# Altium PCB PWR_PCB2.PcbDoc (part 1 of 3)
Units mil, origin at the board's own origin, x right, y up, seen from the top; angles counter-clockwise.
Board outline 9000 x 6000 mil, 4 copper layers (Top Layer, GND Layer, Power Layer, Bottom Layer), stack 27.912 mil thick; 125 components, 92 nets, 479 pads, 4387 vias.
Unrouted connection lines stored in the file: 22.
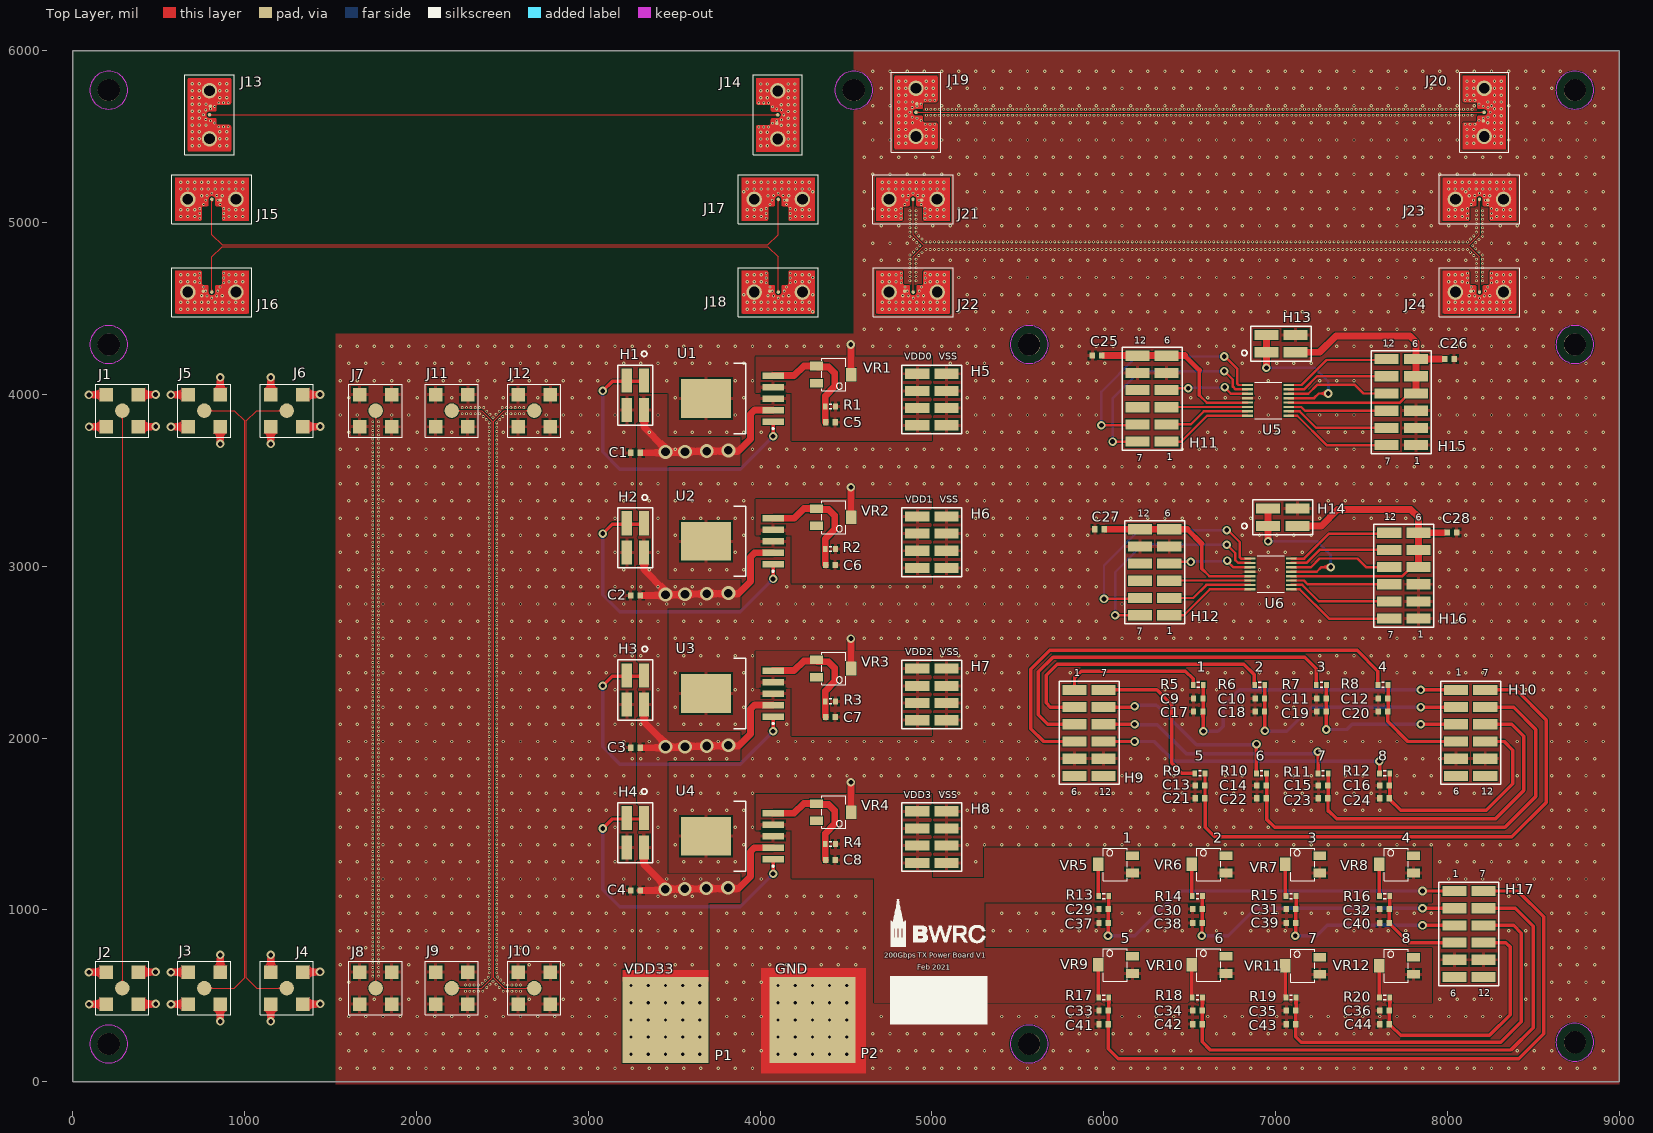
[diagram p0: Top Layer view]
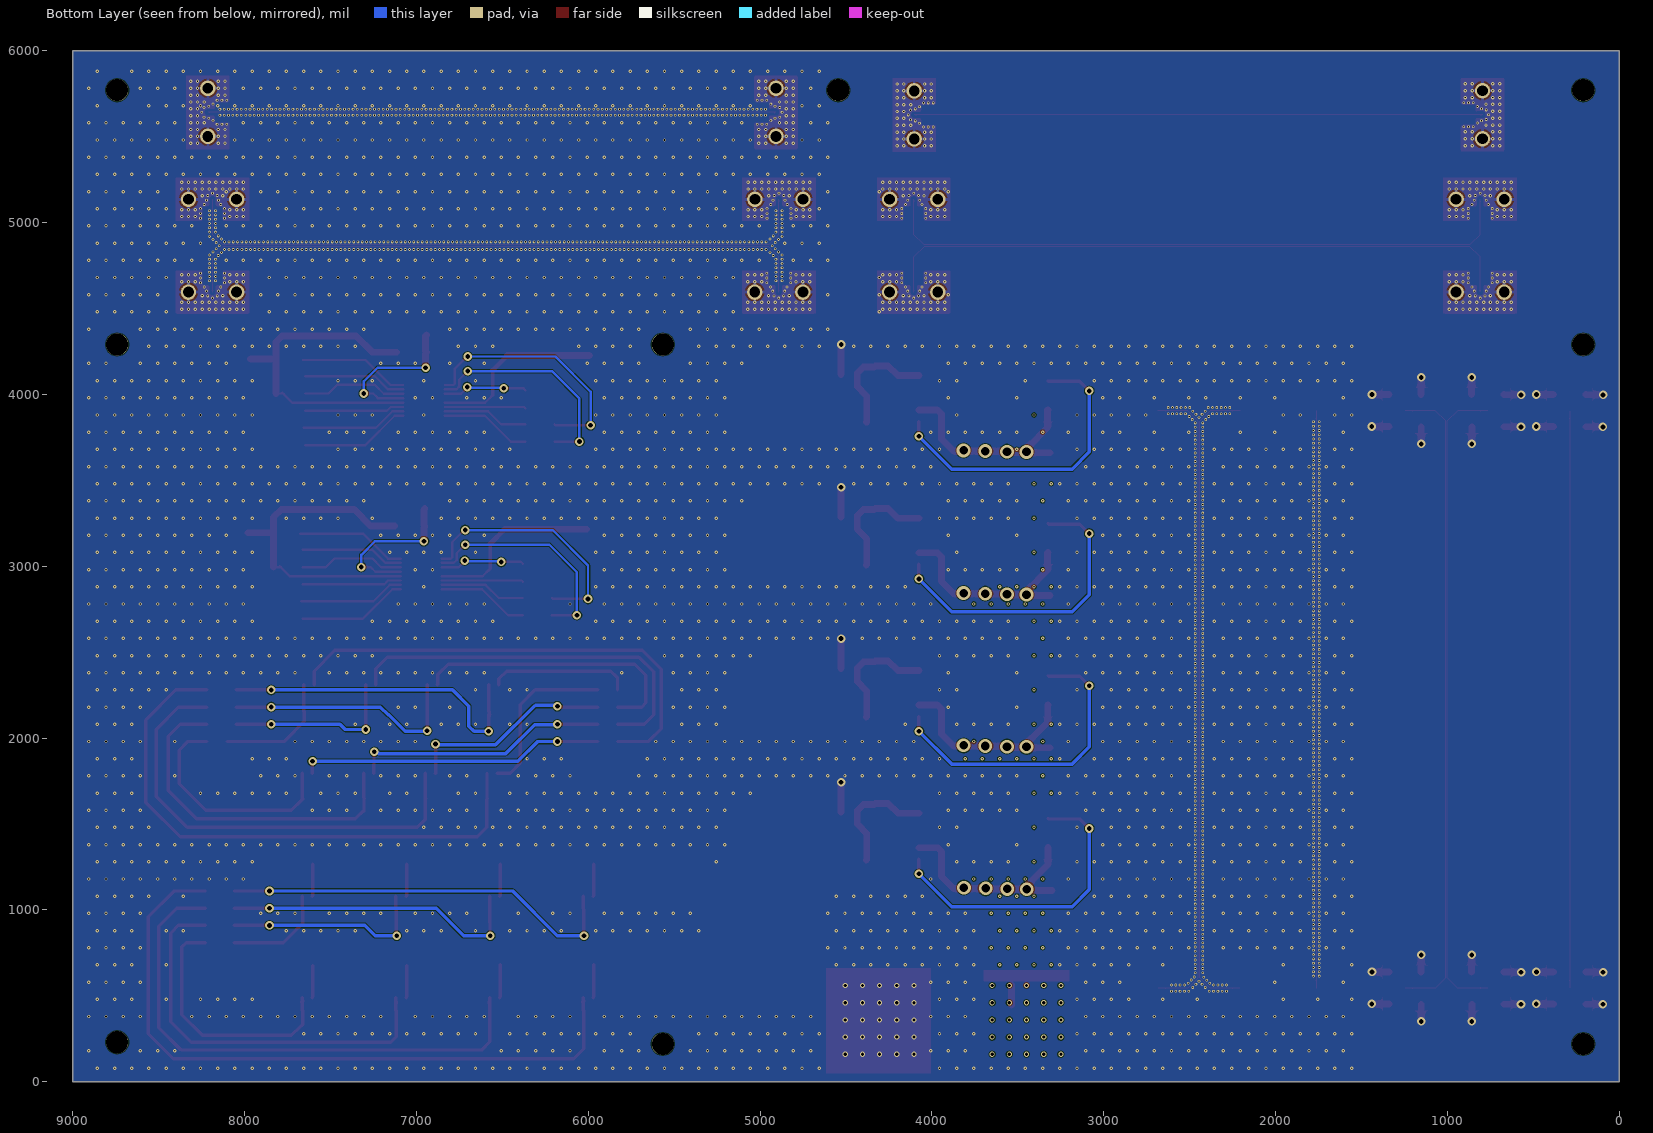
[diagram p1: Bottom Layer view, seen from below]
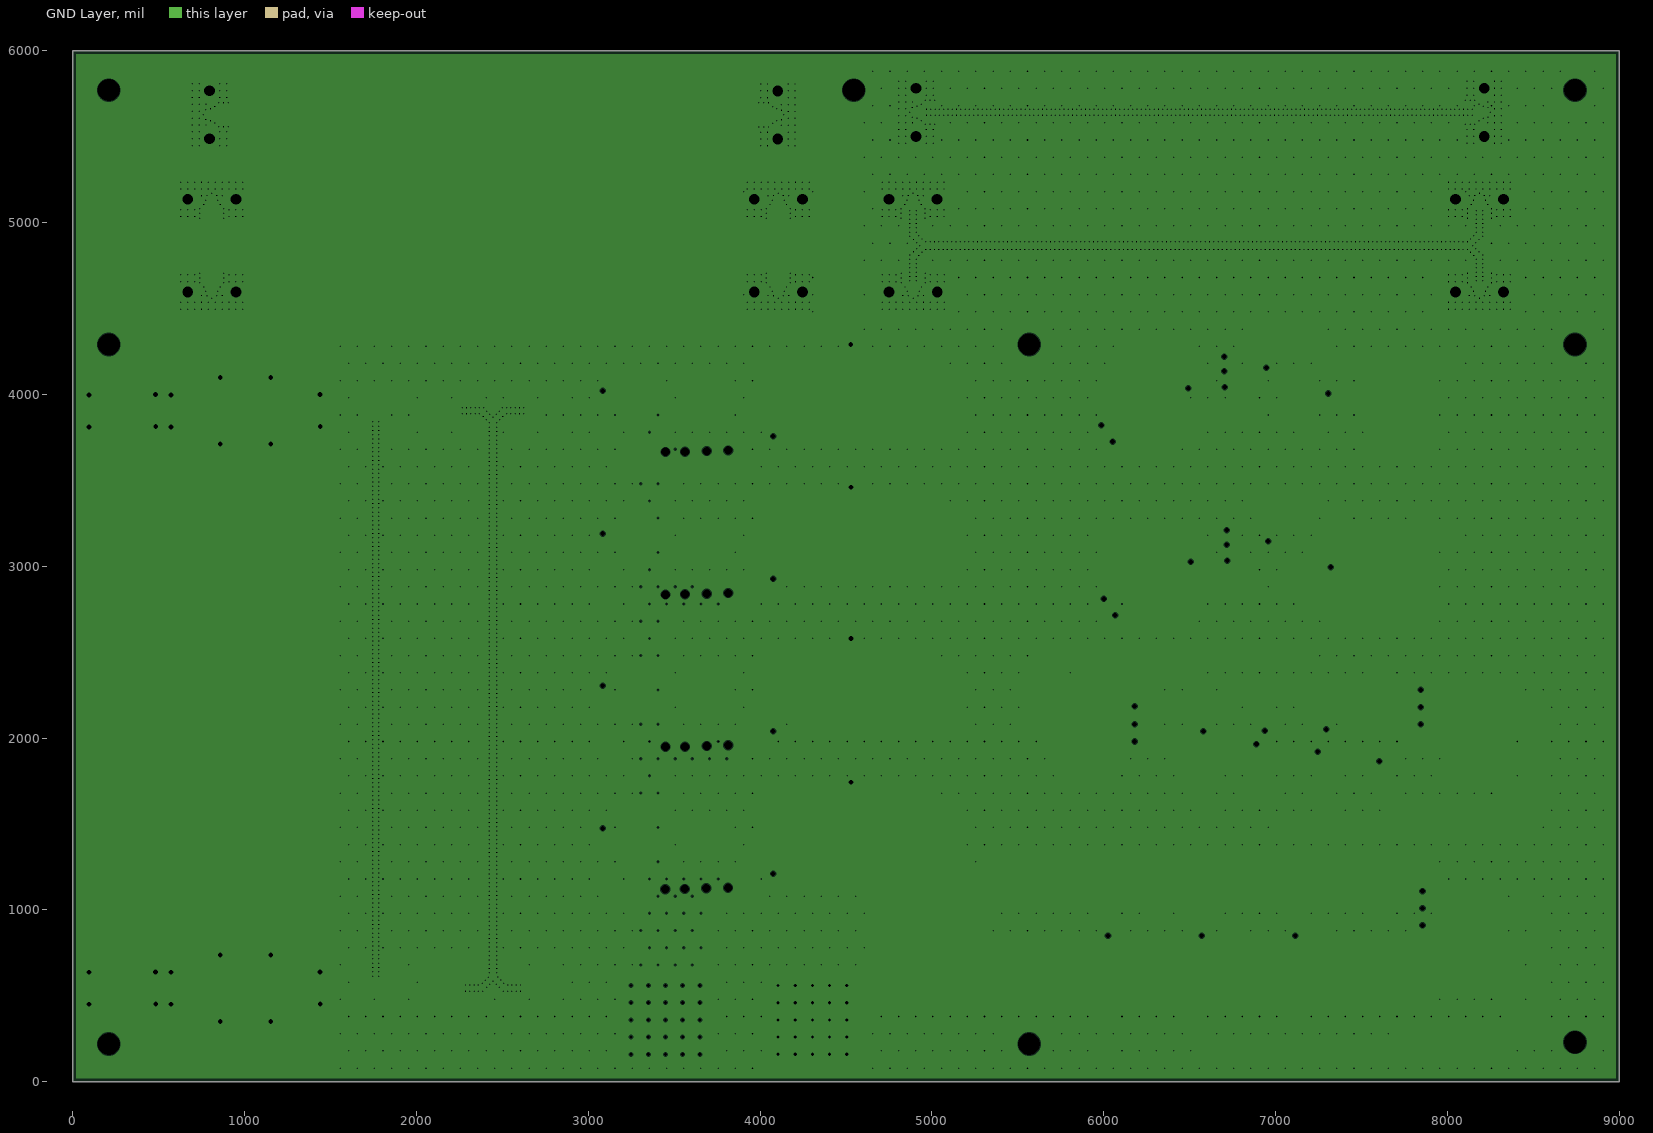
[diagram p2: GND Layer, clearances drawn from the general rule]
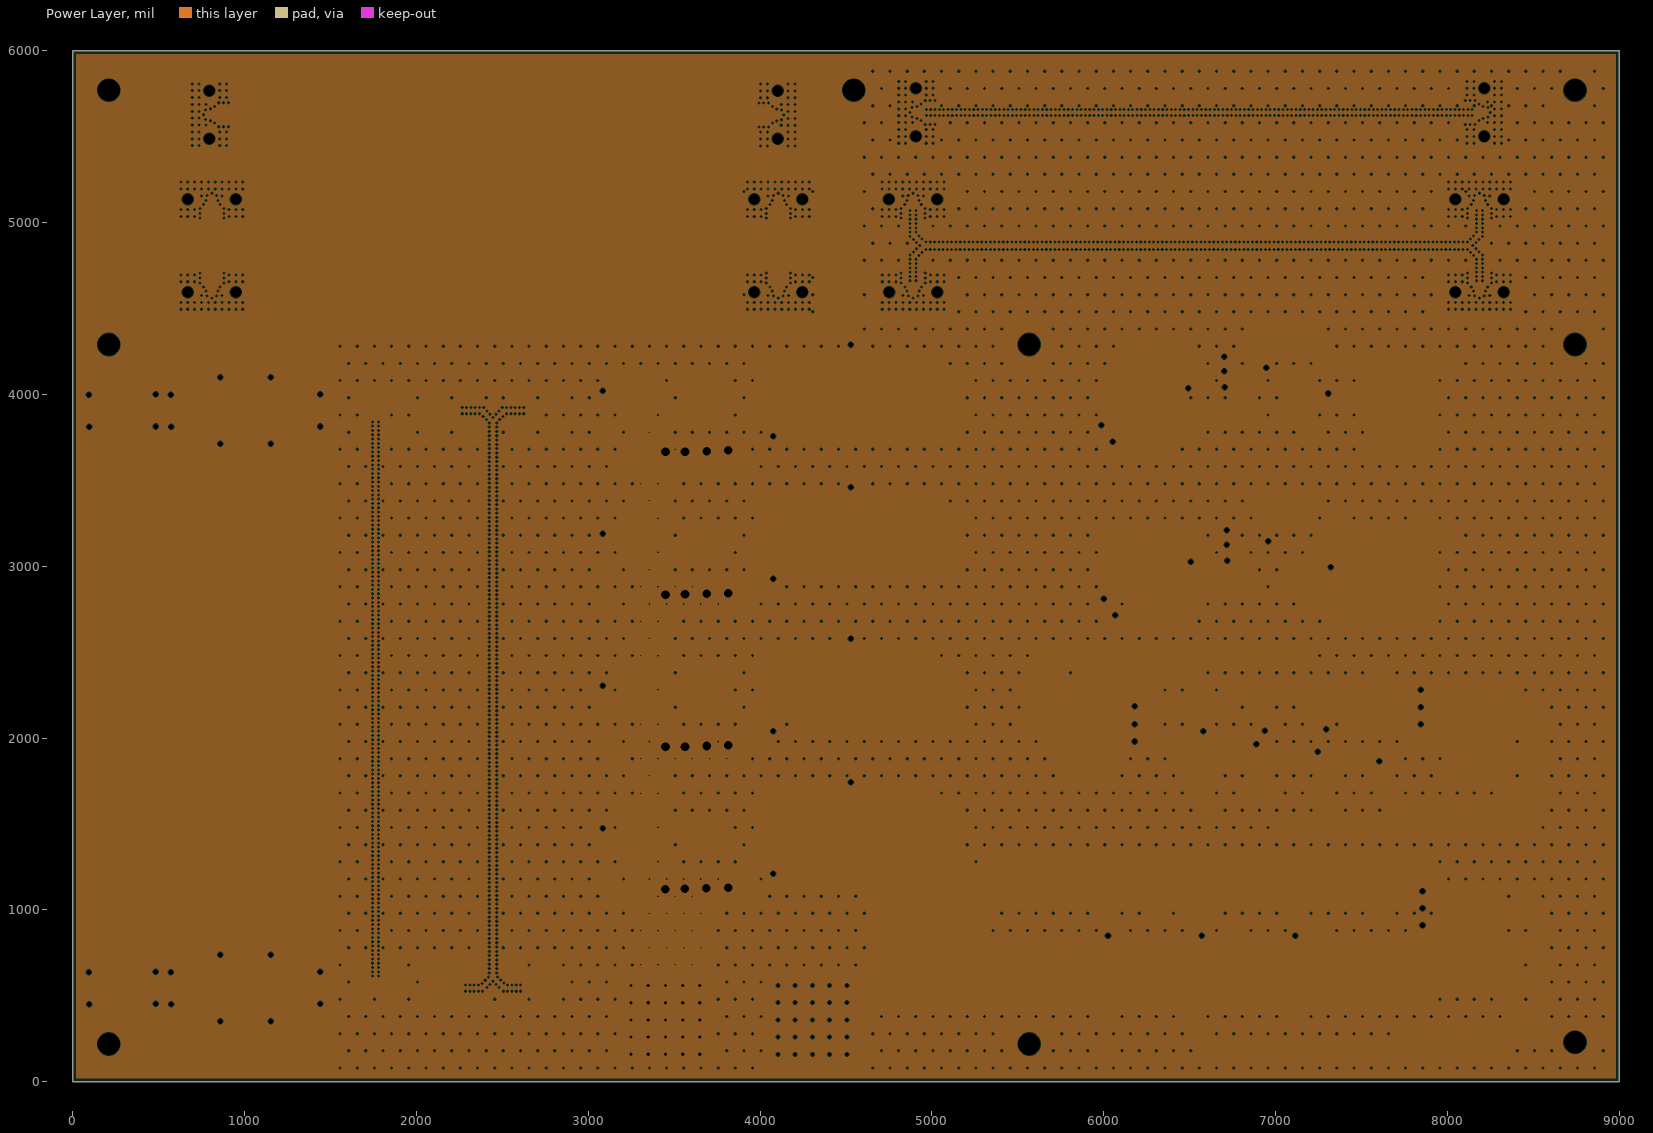
[diagram p3: Power Layer, clearances drawn from the general rule]

## Layer stack, top to bottom
Top Solder: solder mask 0.4, Solder Resist, Dk 3.5
Top Layer: signal copper 1.4
Dielectric 2: prepreg 3.5, PP-001, Dk 4.02
GND Layer: plane copper 2.7559, net GND
Dielectric 1: dielectric 12.6, FR-4, Dk 4.8
Power Layer: plane copper 2.7559, net VDD33
Dielectric 3: prepreg 3.5, PP-001, Dk 4.02
Bottom Layer: signal copper 1.4
Bottom Solder: solder mask 0.4, Solder Resist, Dk 3.5

## Board outline
0,0 0,6000 9000,6000 9000,0

## Design rules (kind name [scope] priority, off if disabled: settings)
Clearance [All] p1: gap=5 ignorepadtopadclearanceinfootprint=FALSE except(10: SMDPad-Via THPad-Via; 20: Arc-THPad Track-THPad SMDPad-THPad THPad-THPad Via-Via)
DiffPairsRouting [All] p1: maxlimit=10 minlimit=5 mostfreqgap=10 toplayer_maxgap=5 toplayer_prefgap=5 toplayer_minwidth=4.5 toplayer_maxwidth=5 toplayer_prefwidth=4.5 bottomlayer_mingap=10 bottomlayer_minwidth=15 bottomlayer_maxwidth=15 bottomlayer_prefwidth=15 maxuncoupledlength=500
HoleSize [All] p1: absolutevalues=TRUE maxlimit=200 minlimit=8 maxpercent=80.000 minpercent=20.000
MinimumSolderMaskSliver [All] p1: minsoldermaskwidth=8
PlaneClearance [All] p1: clearance=5
PlaneConnect [All] p1: planeconnectstyle=Direct reliefexpansion=20 reliefentries=4 reliefconductorwidth=10 reliefairgap=10
PolygonConnect [All] p1: thpad.connectstyle=Relief thpad.reliefconductorwidth=20 thpad.reliefentries=4 thpad.polygonreliefangle="90 Angle" thpad.airgapwidth=10 smdpad.connectstyle=Relief smdpad.reliefconductorwidth=20 smdpad.reliefentries=4 smdpad.polygonreliefangle="90 Angle" smdpad.airgapwidth=10 via.connectstyle=Direct via.reliefconductorwidth=10 via.reliefentries=4 via.polygonreliefangle="90 Angle" via.airgapwidth=10
RoutingVias [All] p1: holewidth=28 width=50 viastyle="Through Hole" minholewidth=8 minwidth=16 maxholewidth=150 maxwidth=200
SilkToSolderMaskClearance [IsPad] p1: minsilkscreentomaskgap=2 clearancetoexposedcopper=TRUE
SolderMaskExpansion [All] p1: expansion=4 istentingtop=FALSE
Width [All] p1: maxlimit=40 minlimit=4.5 preferedwidth=20
24 further rules are at their usual default settings.

## Classes and differential pairs
differential pair CK3: +CK3_P -CK3_N
differential pair CK2: +CK2_P -CK2_N
differential pair CK1: +CK1_P -CK1_N
differential pair CK0: +CK0_P -CK0_N

## Components (designator, comment, footprint, x,y, rotation, side; value= is the part's Value field where it differs from the comment)
C1 "Cap Semi" 1608[0603] 3274.5,3660 r0 top value=10uF
C2 "Cap Semi" 1608[0603] 3274.5,2830 r0 top value=10uF
C3 "Cap Semi" 1608[0603] 3274.47,1943.92 r0 top value=10uF
C4 "Cap Semi" 1608[0603] 3274.47,1113.92 r0 top value=10uF
C5 "Cap Semi" 1608[0603] 4409.5,3837.5 r0 top value=3.3nF
C6 "Cap Semi" 1608[0603] 4409.5,3007.5 r0 top value=3.3nF
C7 "Cap Semi" 1608[0603] 4409.47,2121.42 r0 top value=3.3nF
C8 "Cap Semi" 1608[0603] 4409.47,1291.42 r0 top value=3.3nF
C9 "Cap Semi" 1608[0603] 6549.5,2230 r0 top value=10uF
C10 "Cap Semi" 1608[0603] 6907.83,2230 r0 top value=10uF
C11 "Cap Semi" 1608[0603] 7266.17,2230 r0 top value=10uF
C12 "Cap Semi" 1608[0603] 7624.5,2230 r0 top value=10uF
C13 "Cap Semi" 1608[0603] 6559.5,1725 r0 top value=10uF
C14 "Cap Semi" 1608[0603] 6917.83,1725 r0 top value=10uF
C15 "Cap Semi" 1608[0603] 7276.17,1725 r0 top value=10uF
C16 "Cap Semi" 1608[0603] 7634.5,1725 r0 top value=10uF
C17 "Cap Semi" 1608[0603] 6549.5,2155 r0 top value=1uF
C18 "Cap Semi" 1608[0603] 6907.83,2155 r0 top value=1uF
C19 "Cap Semi" 1608[0603] 7266.17,2155 r0 top value=1uF
C20 "Cap Semi" 1608[0603] 7624.5,2155 r0 top value=1uF
C21 "Cap Semi" 1608[0603] 6559.5,1650 r0 top value=1uF
C22 "Cap Semi" 1608[0603] 6917.83,1650 r0 top value=1uF
C23 "Cap Semi" 1608[0603] 7276.17,1650 r0 top value=1uF
C24 "Cap Semi" 1608[0603] 7634.5,1650 r0 top value=1uF
C25 "Cap Semi" 1608[0603] 5961,4225 r0 top value=1uF
C26 "Cap Semi" 1608[0603] 8011,4205 r180 top value=100nF
C27 "Cap Semi" 1608[0603] 5976,3215 r0 top value=1uF
C28 "Cap Semi" 1608[0603] 8026,3195 r180 top value=100nF
C29 "Cap Semi" 1608[0603] 5999.5,1005 r0 top value=10uF
C30 "Cap Semi" 1608[0603] 6544.5,1005 r0 top value=10uF
C31 "Cap Semi" 1608[0603] 7089.5,1005 r0 top value=10uF
C32 "Cap Semi" 1608[0603] 7634.5,1005 r0 top value=10uF
C33 "Cap Semi" 1608[0603] 5999.5,415 r0 top value=10uF
C34 "Cap Semi" 1608[0603] 6544.5,415 r0 top value=10uF
C35 "Cap Semi" 1608[0603] 7089.5,415 r0 top value=10uF
C36 "Cap Semi" 1608[0603] 7634.5,415 r0 top value=10uF
C37 "Cap Semi" 1608[0603] 5999.5,925 r0 top value=1uF
C38 "Cap Semi" 1608[0603] 6544.5,925 r0 top value=1uF
C39 "Cap Semi" 1608[0603] 7089.5,925 r0 top value=1uF
C40 "Cap Semi" 1608[0603] 7634.5,925 r0 top value=1uF
C41 "Cap Semi" 1608[0603] 5999.5,335 r0 top value=1uF
C42 "Cap Semi" 1608[0603] 6544.5,335 r0 top value=1uF
C43 "Cap Semi" 1608[0603] 7089.5,335 r0 top value=1uF
C44 "Cap Semi" 1608[0603] 7634.5,335 r0 top value=1uF
H1 "HEADER_2X2_SMT" HEADER_2X2_SMT 3274.5,3995 r90 top
H2 "HEADER_2X2_SMT" HEADER_2X2_SMT 3274.5,3165 r90 top
H3 "HEADER_2X2_SMT" HEADER_2X2_SMT 3274.47,2279.92 r90 top
H4 "HEADER_2X2_SMT" HEADER_2X2_SMT 3274.47,1448.92 r90 top
H5 "HEADER_2X4_SMT" HEADER_2X4_SMT 4999.5,3970 r180 top
H6 "HEADER_2X4_SMT" HEADER_2X4_SMT 4999.5,3140 r180 top
H7 "HEADER_2X4_SMT" HEADER_2X4_SMT 4999.47,2253.92 r180 top
H8 "HEADER_2X4_SMT" HEADER_2X4_SMT 4999.47,1423.92 r180 top
H9 "HEADER_2X6_SMT" HDR2X6_SMT 5914.5,2030 r0 top
H10 "HEADER_2X6_SMT" HDR2X6_SMT 8134.5,2030 r0 top
H11 "HEADER_2X6_SMT" HDR2X6_SMT 6281,3975 r180 top
H12 "HEADER_2X6_SMT" HDR2X6_SMT 6296,2965 r180 top
H13 "HEADER_2X2_SMT" HEADER_2X2_SMT 7031,4295 r180 top
H14 "HEADER_2X2_SMT" HEADER_2X2_SMT 7041,3285 r180 top
H15 "HEADER_2X6_SMT" HDR2X6_SMT 7731,3955 r180 top
H16 "HEADER_2X6_SMT" HDR2X6_SMT 7746,2945 r180 top
H17 "HEADER_2X6_SMT" HDR2X6_SMT 8124.5,860 r0 top
J1 "Con RF SMA" CON-001-250X250/SMA-SMT 289,3905 r0 top
J2 "Con RF SMA" CON-001-250X250/SMA-SMT 289,545 r0 top
J3 "Con RF SMA" CON-001-250X250/SMA-SMT 766,545 r90 top
J4 "Con RF SMA" CON-001-250X250/SMA-SMT 1246,545 r90 top
J5 "Con RF SMA" CON-001-250X250/SMA-SMT 766,3905 r90 top
J6 "Con RF SMA" CON-001-250X250/SMA-SMT 1246,3905 r90 top
J7 "Con RF SMA" CON-001-250X250/SMA-SMT 1763,3905 r0 top
J8 "Con RF SMA" CON-001-250X250/SMA-SMT 1763,545 r0 top
J9 "Con RF SMA" CON-001-250X250/SMA-SMT 2206,545 r90 top
J10 "Con RF SMA" CON-001-250X250/SMA-SMT 2686,545 r90 top
J11 "Con RF SMA" CON-001-250X250/SMA-SMT 2206,3905 r90 top
J12 "Con RF SMA" CON-001-250X250/SMA-SMT 2686,3905 r90 top
J13 "CON_K_SMT_2d92" CON_K_SMT_2D92 796,5627 r0 top
J14 "CON_K_SMT_2d92" CON_K_SMT_2D92 4103,5626 r180 top
J15 "CON_K_SMT_2d92" CON_K_SMT_2D92 810,5135 r270 top
J16 "CON_K_SMT_2d92" CON_K_SMT_2D92 810,4595 r90 top
J17 "CON_K_SMT_2d92" CON_K_SMT_2D92 4106,5135 r270 top
J18 "CON_K_SMT_2d92" CON_K_SMT_2D92 4106,4595 r90 top
J19 "CON_K_SMT_2d92" CON_K_SMT_2D92 4907,5641 r0 top
J20 "CON_K_SMT_2d92" CON_K_SMT_2D92 8213.5,5641 r180 top
J21 "CON_K_SMT_2d92" CON_K_SMT_2D92 4890,5135 r270 top
J22 "CON_K_SMT_2d92" CON_K_SMT_2D92 4891,4595 r90 top
J23 "CON_K_SMT_2d92" CON_K_SMT_2D92 8186,5135 r270 top
J24 "CON_K_SMT_2d92" CON_K_SMT_2D92 8186,4595 r90 top
P1 "BANANA_JACK_SMT" BANANA_JACK_SMT 3449.5,360 r0 top
P2 "BANANA_JACK_SMT" BANANA_JACK_SMT 4304.5,360 r0 top
R1 "Res3" J1-0603 4409.5,3930 r0 top value=1.4K
R2 "Res3" J1-0603 4409.5,3100 r0 top value=1.4K
R3 "Res3" J1-0603 4409.47,2213.92 r0 top value=1.4K
R4 "Res3" J1-0603 4409.47,1383.92 r0 top value=1.4K
R5 "Res3" J1-0603 6549.5,2310 r180 top value=1K
R6 "Res3" J1-0603 6907.83,2310 r180 top value=1K
R7 "Res3" J1-0603 7266.17,2310 r180 top value=1K
R8 "Res3" J1-0603 7624.5,2310 r180 top value=1K
R9 "Res3" J1-0603 6559.5,1795 r180 top value=1K
R10 "Res3" J1-0603 6917.83,1795 r180 top value=1K
R11 "Res3" J1-0603 7276.17,1795 r180 top value=1K
R12 "Res3" J1-0603 7634.5,1795 r180 top value=1K
R13 "Res3" J1-0603 5999.5,1080 r180 top value=1K
R14 "Res3" J1-0603 6544.5,1080 r180 top value=1K
R15 "Res3" J1-0603 7089.5,1080 r180 top value=1K
R16 "Res3" J1-0603 7634.5,1080 r180 top value=1K
R17 "Res3" J1-0603 5999.5,490 r180 top value=1K
R18 "Res3" J1-0603 6544.5,490 r180 top value=1K
R19 "Res3" J1-0603 7089.5,490 r180 top value=1K
R20 "Res3" J1-0603 7634.5,490 r180 top value=1K
U1 "LP38511TJ-ADJ" TJ5A_N 3839.5,3975 r180 top
U2 "LP38511TJ-ADJ" TJ5A_N 3839.5,3145 r180 top
U3 "LP38511TJ-ADJ" TJ5A_N 3839.47,2258.92 r180 top
U4 "LP38511TJ-ADJ" TJ5A_N 3839.47,1428.92 r180 top
U5 "MAX13003" MAX13003 6956,3965 r180 top
U6 "MAX13003" MAX13003 6971,2955 r180 top
VR1 "5K" POT_3214_TOP 4429.47,4115 r0 top
VR2 "5K" POT_3214_TOP 4429.47,3285 r0 top
VR3 "5K" POT_3214_TOP 4429.47,2405 r0 top
VR4 "5K" POT_3214_TOP 4429.47,1568.92 r0 top
VR5 "5K" POT_3214_TOP 6066.69,1265 r180 top
VR6 "5K" POT_3214_TOP 6611.69,1265 r180 top
VR7 "5K" POT_3214_TOP 7156.69,1265 r180 top
VR8 "5K" POT_3214_TOP 7701.69,1265 r180 top
VR9 "5K" POT_3214_TOP 6066.69,680 r180 top
VR10 "5K" POT_3214_TOP 6611.69,680 r180 top
VR11 "5K" POT_3214_TOP 7156.69,675 r180 top
VR12 "5K" POT_3214_TOP 7701.69,675 r180 top

## Footprints (in the part's own frame and the unit in brackets; to place one, negate y for a bottom-side part, rotate by r counter-clockwise, add the part's x,y. Pads: shape width x height; smd on the part's side, far side on the other; paste and mask are expansions set on the pad)
1608[0603] [mm] "Chip Capacitor, Body 1.6x0.8mm, IPC High Density"
  rect 0.8x0.9 smd: 1(-0.7,0) 2(0.7,0)
  body extent -0.87,-0.48 0.87,0.48, height 1.3
BANANA_JACK_SMT [mil]
  rect 500x500 smd: 1(0,0)
CON-001-250X250/SMA-SMT [mm]
  round 2.127 smd: 1(0,0)
  rect 2x2 smd: 2(-2.375,2.375) 3(2.375,2.375) 4(2.375,-2.375) 5(-2.375,-2.35)
  silkscreen extent -3.94,-3.94 3.94,3.94, body extent -3.17,-3.17 3.18,3.17, height 9.65
CON_K_SMT_2D92 [mil]
  round 90 hole 63: 1(0,140) 4(0,-140)
  round 19.68 smd paste-9.84 mask+9.84: 2(5,50)
  round 20 smd paste-10: 3(0,0)
  Top Layer region: -125.52,-215 125.52,-215 125.52,-195 -125.52,-195
  Top Layer region: -125.52,195 125.52,195 125.52,215 -125.52,215
  Top Layer region: -125.51,-205 -125.46,-205.22 -125.32,-205.4 -125.11,-205.5 -124.89,-205.5 -124.68,-205.4 -124.54,-205.22 -124.49,-205 -124.49,-205 -124.49,-0.52 -20.51,-0.52 -17.59,-10.55 -10.11,-17.85 0,-20.52 0,-20.52 0.2,-20.48 0.36,-20.36 0.48,-20.2 0.51,-20 0.51,-20 0.48,-19.8 0.36,-19.64 0.2,-19.52 0,-19.48 0,-19.48 -7.46,-18 -13.78,-13.78 -18,-7.46 -19.49,0 -19.49,0 -18,7.46 -13.78,13.78 -7.46,18 0,19.48 0,19.48 30,19.48 34.02,20.29 37.44,22.56 39.71,25.98 40.51,30 40.51,30 40.51,50 41.24,53.63 43.29,56.71 46.37,58.76 50,59.48 50,59.48 115,59.48 119.02,60.29 122.44,62.56 124.71,65.98 125.52,70 125.52,70 125.52,205 125.48,205.2 125.36,205.36 125.2,205.48 125,205.52 125,205.52 -125,205.52 -125.2,205.48 -125.36,205.36 -125.48,205.2 -125.51,205 -125.51,205
  Top Layer region: -125,-205.52 -125.2,-205.48 -125.36,-205.36 -125.48,-205.2 -125.51,-205 -125.51,-205 -125.51,205 -125.46,205.22 -125.32,205.4 -125.11,205.5 -124.89,205.5 -124.68,205.4 -124.54,205.22 -124.49,205 -124.49,205 -124.49,0.52 -20.51,0.52 -17.59,10.55 -10.11,17.85 0,20.52 0,20.52 0.2,20.48 0.36,20.36 0.48,20.2 0.51,20 0.51,20 0.48,19.8 0.36,19.64 0.2,19.52 0,19.48 0,19.48 -7.46,18 -13.78,13.78 -18,7.46 -19.49,0 -19.49,0 -18,-7.46 -13.78,-13.78 -7.46,-18 0,-19.48 0,-19.48 30,-19.48 34.02,-20.29 37.44,-22.56 39.71,-25.98 40.51,-30 40.51,-30 40.49,-30.15 40.43,-30.29 40.43,-30.29 40.49,-30.42 40.51,-30.58 40.51,-30.58 40.51,-50 41.24,-53.63 43.29,-56.71 46.37,-58.76 50,-59.48 50,-59.48 115,-59.48 119.02,-60.29 122.44,-62.56 124.71,-65.98 125.52,-70 125.52,-70 125.52,-205 125.48,-205.2 125.36,-205.36 125.2,-205.48 125,-205.52 125,-205.52
  silkscreen extent -143,-233 143,233
HDR2X6_SMT [mil]
  rect 140x59.06 smd: 1(-85,250) 2(-85,150) 3(-85,50) 4(-85,-50) 5(-85,-150) 6(-85,-250) 7(85,250) 8(85,150) 9(85,50) 10(85,-50) 11(85,-150) 12(85,-250)
  silkscreen extent -175,-300 175,300
HEADER_2X2_SMT [mil]
  rect 140x59.06 smd: 1(-85,50) 2(85,50) 3(-85,-50) 4(85,-50)
  silkscreen extent -175,-101 175,103
HEADER_2X4_SMT [mil]
  rect 140x59.06 smd: 1(-85,150) 2(85,150) 3(-85,50) 4(85,50) 5(-85,-50) 6(85,-50) 7(-85,-150) 8(85,-150)
  silkscreen extent -175,-200 175,200
J1-0603 [mm] "Chip Resistor, Body 1.6x0.8mm, IPC High Density"
  rect 0.7x0.9 smd: 1(-0.75,0) 2(0.75,0)
  silkscreen extent -0.2,-0.35 0.2,0.35, body extent -0.85,-0.48 0.85,0.48, height 0.9
MAX13003 [mil]
  rect 62.5x13.5 smd paste+0 mask+2: 1(-119.75,89.57) 2(-119.75,63.98) 3(-119.75,38.39) 4(-119.75,12.8) 5(-119.75,-12.8) 6(-119.75,-38.39) 7(-119.75,-63.98) 8(-119.75,-89.57) 9(119.75,-89.57) 10(119.75,-63.98) 11(119.75,-38.39) 12(119.75,-12.8) 13(119.75,12.8) 14(119.75,38.39) 15(119.75,63.98) 16(119.75,89.57)
  silkscreen extent -78,-106 78,106
POT_3214_TOP [mil] "5 turn Trimpot, 3214, Top adjust"
  rect 75x50 smd: 1(-100,50) 3(-100,-50)
  rect 61x79 smd: 2(100,0)
  silkscreen extent -70,-95 70,95, body extent -70,-95 70,95, height 200
TJ5A_N [mm] "D2-PAK, 6-Leads, Body 9.9x10.2mm, Pitch 1.7mm, Lead Span 14mm, IPC Medium Density"
  rect 3.2x0.95 smd: 1(-6,3.4) 2(-6,1.7) 3(-6,0) 4(-6,-1.7) 5(-6,-3.4)
  rect 7.4x5.75 smd: 6(3.9,0)
  silkscreen extent -6.13,-5.2 -0.2,5.2, body extent -1.95,-5.2 8.15,5.2, height 2.1

## Part data
C1 C2 C3 C4 C5 C6 C7 C8 C9 C10 C11 C12 C13 C14 C15 C16 C17 C18 C19 C20 C21 C22 C23 C24 C25 C26 C27 C28 C29 C30 C31 C32 C33 C34 C35 C36 C37 C38 C39 C40 C41 C42 C43 C44: "Capacitor (Semiconductor SIM Model)", LatestRevisionDate=29-May-2009, LatestRevisionNote="IPC-7351 Footprint Added.", PackageDescription="Chip Capacitor", PackageReference=C1206, Published=8-Jun-2000, Publisher="Altium Limited"
J1 J2 J3 J4 J5 J6 J7 J8 J9 J10 J11 J12: library part CON_RF_SMA
J13 J14 J15 J16 J17 J18 J19 J20 J21 J22 J23 J24: "Con RF K"
R1 R2 R3 R4 R5 R6 R7 R8 R9 R10 R11 R12 R13 R14 R15 R16 R17 R18 R19 R20: "Resistor", LatestRevisionDate=29-May-2009, LatestRevisionNote="IPC-7351 Footprint Added.", PackageDescription="Chip Resistor", PackageReference=J1-0603, Published=8-Jun-2000, Publisher="Altium Limited"
U1 U2 U3 U4: "800 mA Fast-Transient Response Low-Dropout Linear Voltage Regulator with Error Flag, 6-pin TO-263 Thin", Manufacturer="National Semiconductor", PackageTopMarking=NSUZXYTTE#*LP38511*TJ-ADJ, PowerWise=N, ComponentLink1Description="Manufacturer URL", ComponentLink1URL=http://www.national.com/, ComponentLink2Description="LP38511 Datasheet", ComponentLink2URL=http://www.national.com/ds/LP/LP38511-ADJ.pdf, ComponentLink3Description="LP38511 Web Page", ComponentLink3URL=http://www.national.com/pf/LP/LP38511.html, ComponentLink4Description="TJ5A Package Page", ComponentLink4URL=http://www.national.com/packaging/folders/tj5a.html, CompType="LDO IC", DatasheetVersion=Feb-2009, High-Reliability=Y, PackageDescription="Thin TO-263, Molded, 9.85 x 10.16 x 2mm Body, 5 Lead, 1.7mm Pitch, Surface Mount", PackageReference=TJ5A, PackageVersion="revE, Jan-2008", PartNumber=LP38511TJ-ADJ, PinCount=5, RoHS=Y
VR1 VR2 VR3 VR4 VR5 VR6 VR7 VR8 VR9 VR10 VR11 VR12: library part RPot_5K, "Potentiometer", Manufacturer=Bourns, Manufacturer ID=3214X-1-502E, Digikey ID=3214X-1-502ECT-ND

## Free pads (board coordinates)
  round 128.35 hole 128.5 unplated: 0(210,220) 0(210,4290) 0(210,5770) 0(4545,5770) 0(5566,220) 0(5566,4290) 0(8741,230) 0(8741,4290) 0(8741,5770)

## Via types
v1: diameter 20, hole 9, Top Layer to Bottom Layer, tented both sides, 2529 vias
v2: diameter 16, hole 8, Top Layer to Bottom Layer, 1158 vias
v3: diameter 20, hole 8, Top Layer to Bottom Layer, tented both sides, 408 vias
v4: diameter 16, hole 8, Top Layer to Bottom Layer, tented both sides, 156 vias
v5: diameter 50, hole 28, Top Layer to Bottom Layer, 70 vias
v6: diameter 30, hole 19, Top Layer to Bottom Layer, 50 vias
v7: diameter 80, hole 50, Top Layer to Bottom Layer, 16 vias

## Nets (pads, with @x,y where several pads share a name; then routed paths per layer and width w, separated by ;. In a path a pad name is that pad's centre, name@x,y a point inside that pad or via, vN(x,y) a via of type N, cw(c..) or ccw(c..) an arc to the next point about the centre after c; other vN are vias at no path point)
CK0: J1.1 J2.1 | length 3360
  Top Layer w5: J2.1@289,545 J1.1@289,3905
CK0_N: J4.1 J6.1 | length 3759.7
  Top Layer w5: J4.1@1246,545 1071,545 1011,605 1011,3845 1071,3905 J6.1@1246,3905
CK0_P: J3.1 J5.1 | length 3759.7
  Top Layer w5: J3.1@766,545 941,545 1001,605 1001,3845 941,3905 J5.1@766,3905
CK1: J7.1 J8.1 | length 3360
  Top Layer w4.5: J8.1@1763,545 J7.1@1763,3905
CK1_N: J10.1 J12.1 | length 3759.9
  Top Layer w4.5: J10.1@2686,545 2511,545 2450.75,605.25 2450.75,3844.75 2511,3905 J12.1@2686,3905
CK1_P: J9.1 J11.1 | length 3759.9
  Top Layer w4.5: J9.1@2206,545 2381,545 2441.25,605.25 2441.25,3844.75 2381,3905 J11.1@2206,3905
CK2: J13.3 J14.3 | length 3307.2
  Top Layer w5: J13.3@796,5627 796.5,5626.5 J14.3@4103,5626.5
CK2_N: J16.3 J18.3 | length 3755.7
  Top Layer w5: J16.3@810,4595 810,4800 870,4860 4046,4860 4106,4800 J18.3@4106,4595
CK2_P: J15.3 J17.3 | length 3755.7
  Top Layer w5: J15.3@810,5135 810,4930 870,4870 4046,4870 4106,4930 J17.3@4106,5135
CK3: J19.3 J20.3 | length 3306.5
  Top Layer w4.5: J19.3@4907,5641 J20.3@8213.5,5641
CK3_N: J22.3 J24.3 | length 3756.2
  Top Layer w4.5: J22.3@4890,4595 4890,4800.25 4950,4860.25 8126,4860.25 8186,4800.25 J24.3@8186,4595
CK3_P: J21.3 J23.3 | length 3756.2
  Top Layer w4.5: J21.3@4890,5135 4890,4929.75 4950,4869.75 8126,4869.75 8186,4929.75 J23.3@8186,5135
DIG0_0: H15.7 U5.1 | length 640.8
  Top Layer w14: U5.1@7075.75,3875.43 7125.57,3875.43 7296,3705 H15.7@7646,3705
DIG0_1: H16.7 U6.1 | length 640.8
  Top Layer w14: U6.1@7090.75,2865.43 7140.57,2865.43 7311,2695 H16.7@7661,2695
DIG0_V33_0: H11.1 U5.16 | length 532.6
  Top Layer w14: H11.1@6366,3725 6451,3725 6601.43,3875.43 U5.16@6836.25,3875.43
DIG0_V33_1: H12.1 U6.16 | length 532.6
  Top Layer w14: H12.1@6381,2715 6466,2715 6616.43,2865.43 U6.16@6851.25,2865.43
DIG1_0: H15.8 U5.2 | length 620
  Top Layer w14: U5.2@7075.75,3901.02 7139.98,3901.02 7236,3805 H15.8@7646,3805 H15.8@7656,3805
DIG1_1: H16.8 U6.2 | length 620
  Top Layer w14: U6.2@7090.75,2891.02 7154.98,2891.02 7251,2795 H16.8@7661,2795 H16.8@7671,2795
DIG1_V33_0: H11.2 U5.15 | length 501.7
  Top Layer w14: H11.2@6366,3825 6506,3825 6582.02,3901.02 U5.15@6836.25,3901.02
DIG1_V33_1: H12.2 U6.15 | length 501.7
  Top Layer w14: H12.2@6381,2815 6521,2815 6597.02,2891.02 U6.15@6851.25,2891.02
DIG2_0: H15.9 U5.3 | length 579.2
  Top Layer w14: U5.3@7075.75,3926.61 7149.39,3926.61 7171,3905 H15.9@7646,3905
DIG2_1: H16.9 U6.3 | length 579.2
  Top Layer w14: U6.3@7090.75,2916.61 7164.39,2916.61 7186,2895 H16.9@7661,2895
DIG2_V33_0: H11.3 U5.14 | length 473
  Top Layer w14: H11.3@6366,3920 6372.61,3926.61 U5.14@6836.25,3926.61
DIG2_V33_1: H12.3 U6.14 | length 473
  Top Layer w14: H12.3@6381,2910 6387.61,2916.61 U6.14@6851.25,2916.61
DIG3_0: H15.10 U5.6 | length 612.3
  Top Layer w14: U5.6@7075.75,4003.39 7189.39,4003.39 7241,4055 7461,4055 7511,4005 H15.10@7646,4005
DIG3_1: H16.10 U6.6 | length 612.3
  Top Layer w14: U6.6@7090.75,2993.39 7204.39,2993.39 7256,3045 7476,3045 7526,2995 H16.10@7661,2995
DIG3_V33_0: H11.4 U5.11 | length 495.6
  Top Layer w14: H11.4@6366,4025 6376,4035 v5(6491,4035) ; v5(6703.5,4042.5) 6703.5,4039.23 6739.34,4003.39 U5.11@6836.25,4003.39
  Bottom Layer w14: v5(6491,4035) 6494.75,4038.75 6699.75,4038.75 v5(6703.5,4042.5)
DIG3_V33_1: H12.4 U6.11 | length 495.6
  Top Layer w14: H12.4@6381,3015 6391,3025 v5(6506,3025) ; v5(6718.5,3032.5) 6718.5,3029.23 6754.34,2993.39 U6.11@6851.25,2993.39
  Bottom Layer w14: v5(6506,3025) 6509.75,3028.75 6714.75,3028.75 v5(6718.5,3032.5)
DIG4_0: H15.11 U5.7 | length 601.7
  Top Layer w14: U5.7@7075.75,4028.98 7164.98,4028.98 7241,4105 H15.11@7646,4105
DIG4_1: H16.11 U6.7 | length 601.7
  Top Layer w14: U6.7@7090.75,3018.98 7179.98,3018.98 7256,3095 H16.11@7661,3095
DIG4_V33_0: H11.7 U5.10 | length 1313.9
  Top Layer w14: v5(6051,3725) H11.7@6196,3725 ; v5(6701,4135) 6751,4085 6751,4045 6767.02,4028.98 U5.10@6836.25,4028.98
  Bottom Layer w14: v5(6051,3725) 6051,3975 6211,4135 v5(6701,4135)
DIG4_V33_1: H12.7 U6.10 | length 1313.9
  Top Layer w14: v5(6066,2715) H12.7@6211,2715 ; v5(6716,3125) 6766,3075 6766,3035 6782.02,3018.98 U6.10@6851.25,3018.98
  Bottom Layer w14: v5(6066,2715) 6066,2965 6226,3125 v5(6716,3125)
DIG5_0: H15.12 U5.8 | length 645.5
  Top Layer w14: U5.8@7075.75,4054.57 7150.57,4054.57 7296,4200 7626,4200 7631,4200 H15.12@7661,4200
DIG5_1: H16.12 U6.8 | length 645.5
  Top Layer w14: U6.8@7090.75,3044.57 7165.57,3044.57 7311,3190 7641,3190 7646,3190 H16.12@7676,3190
DIG5_V33_0: H11.8 U5.9 | length 1461.9
  Top Layer w14: v5(5986,3820) 6191,3820 H11.8@6196,3825 ; v5(6701,4220) 6706,4220 6776,4150 6776,4062.77 6784.2,4054.57 U5.9@6836.25,4054.57
  Bottom Layer w14: v5(5986,3820) 5986,4015 6191,4220 v5(6701,4220)
DIG5_V33_1: H12.8 U6.9 | length 1461.9
  Top Layer w14: v5(6001,2810) 6206,2810 H12.8@6211,2815 ; v5(6716,3210) 6721,3210 6791,3140 6791,3052.77 6799.2,3044.57 U6.9@6851.25,3044.57
  Bottom Layer w14: v5(6001,2810) 6001,3005 6206,3210 v5(6716,3210)
EN_LVL_0: H13.2 H13.4 U5.5 | length 896.4
  Top Layer w14: U5.5@7075.75,3977.8 7223.8,3977.8 7251,4005 v5(7306,4005)
  Top Layer w40: H13.2@6941,4245 6946,4250 6946,4340 H13.4@6941,4345 ; H13.2@6943.5,4237.97 6946,4235.47 v5(6946,4155)
  Bottom Layer w14: v5@6941,4155 7226,4155 7304.97,4076.03 v5@7304.97,4006.03
EN_LVL_1: H14.2 H14.4 U6.5 | length 897.8
  Top Layer w14: U6.5@7090.75,2967.8 7238.8,2967.8 7266,2995 v5(7321,2995)
  Top Layer w40: H14.2@6951,3235 6956,3240 6956,3330 H14.4@6951,3335 ; H14.2@6953.5,3227.97 6956,3225.47 v5(6956,3145)
  Bottom Layer w14: v5(6956,3145) 7241,3145 7319.97,3066.03 7319.97,2996.03 v5(7321,2995)
EN_VDD0: H1.2 H1.4 U1.1 | length 1816.6
  Top Layer w20: v5(3084.5,4020) 3139.5,4075 3224.5,4075 3319.5,4075 H1.4@3324.5,4080 ; v5(4075.72,3756.22) U1.1@4075.72,3841.14
  Bottom Layer w20: v5(3084.5,4020) 3084.5,3665 3184.5,3565 3884.5,3565 v5(4075.72,3756.22)
EN_VDD1: H2.2 H2.4 U2.1 | length 1816.6
  Top Layer w20: v5(3084.5,3190) 3139.5,3245 3224.5,3245 3319.5,3245 H2.4@3324.5,3250 ; v5(4075.72,2926.22) U2.1@4075.72,3011.14
  Bottom Layer w20: v5(3084.5,3190) 3084.5,2835 3184.5,2735 3884.5,2735 v5(4075.72,2926.22)
EN_VDD2: H3.2 H3.4 U3.1 | length 1816.6
  Top Layer w20: v5(3084.47,2303.92) 3139.47,2358.92 3224.47,2358.92 3319.47,2358.92 H3.4@3324.47,2363.92 ; v5(4075.69,2040.14) U3.1@4075.69,2125.06
  Bottom Layer w20: v5(3084.47,2303.92) 3084.47,1948.92 3184.47,1848.92 3884.47,1848.92 v5(4075.69,2040.14)
EN_VDD3: H4.2 H4.4 U4.1 | length 1816.6
  Top Layer w20: v5(3084.47,1473.92) 3139.47,1528.92 3224.47,1528.92 3319.47,1528.92 H4.4@3324.47,1533.92 ; v5(4075.69,1210.14) U4.1@4075.69,1295.06
  Bottom Layer w20: v5(3084.47,1473.92) 3084.47,1118.92 3184.47,1018.92 3884.47,1018.92 v5(4075.69,1210.14)